# Altium PCB WIRELESS.PcbDoc
Units mm, origin at the board's own origin, x right, y up, seen from the top; angles counter-clockwise.
Board outline 49.5 x 65 mm, 2 copper layers (Top Layer, Bottom Layer); 68 components, 56 nets, 197 pads, 119 vias.
Unrouted connection lines stored in the file: 6.
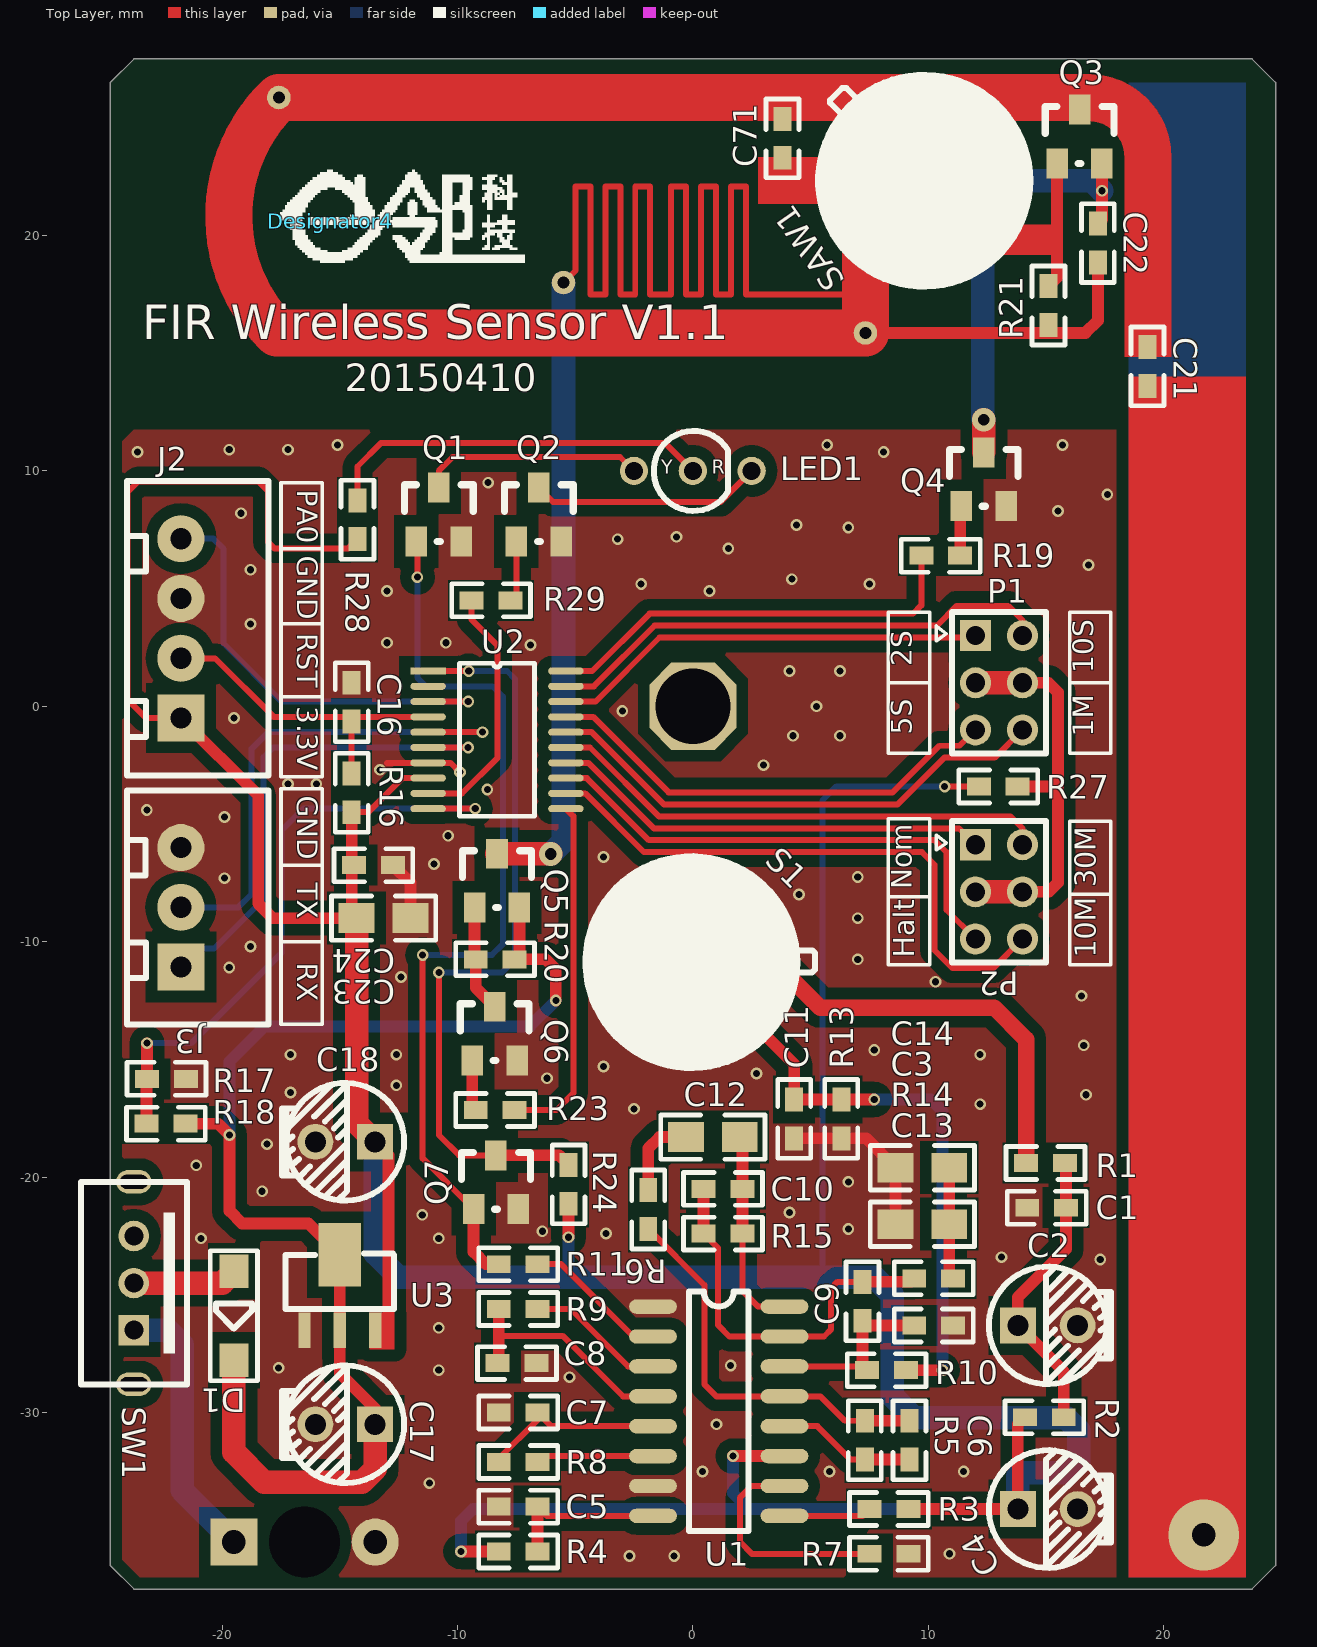
[diagram p0: Top Layer view]
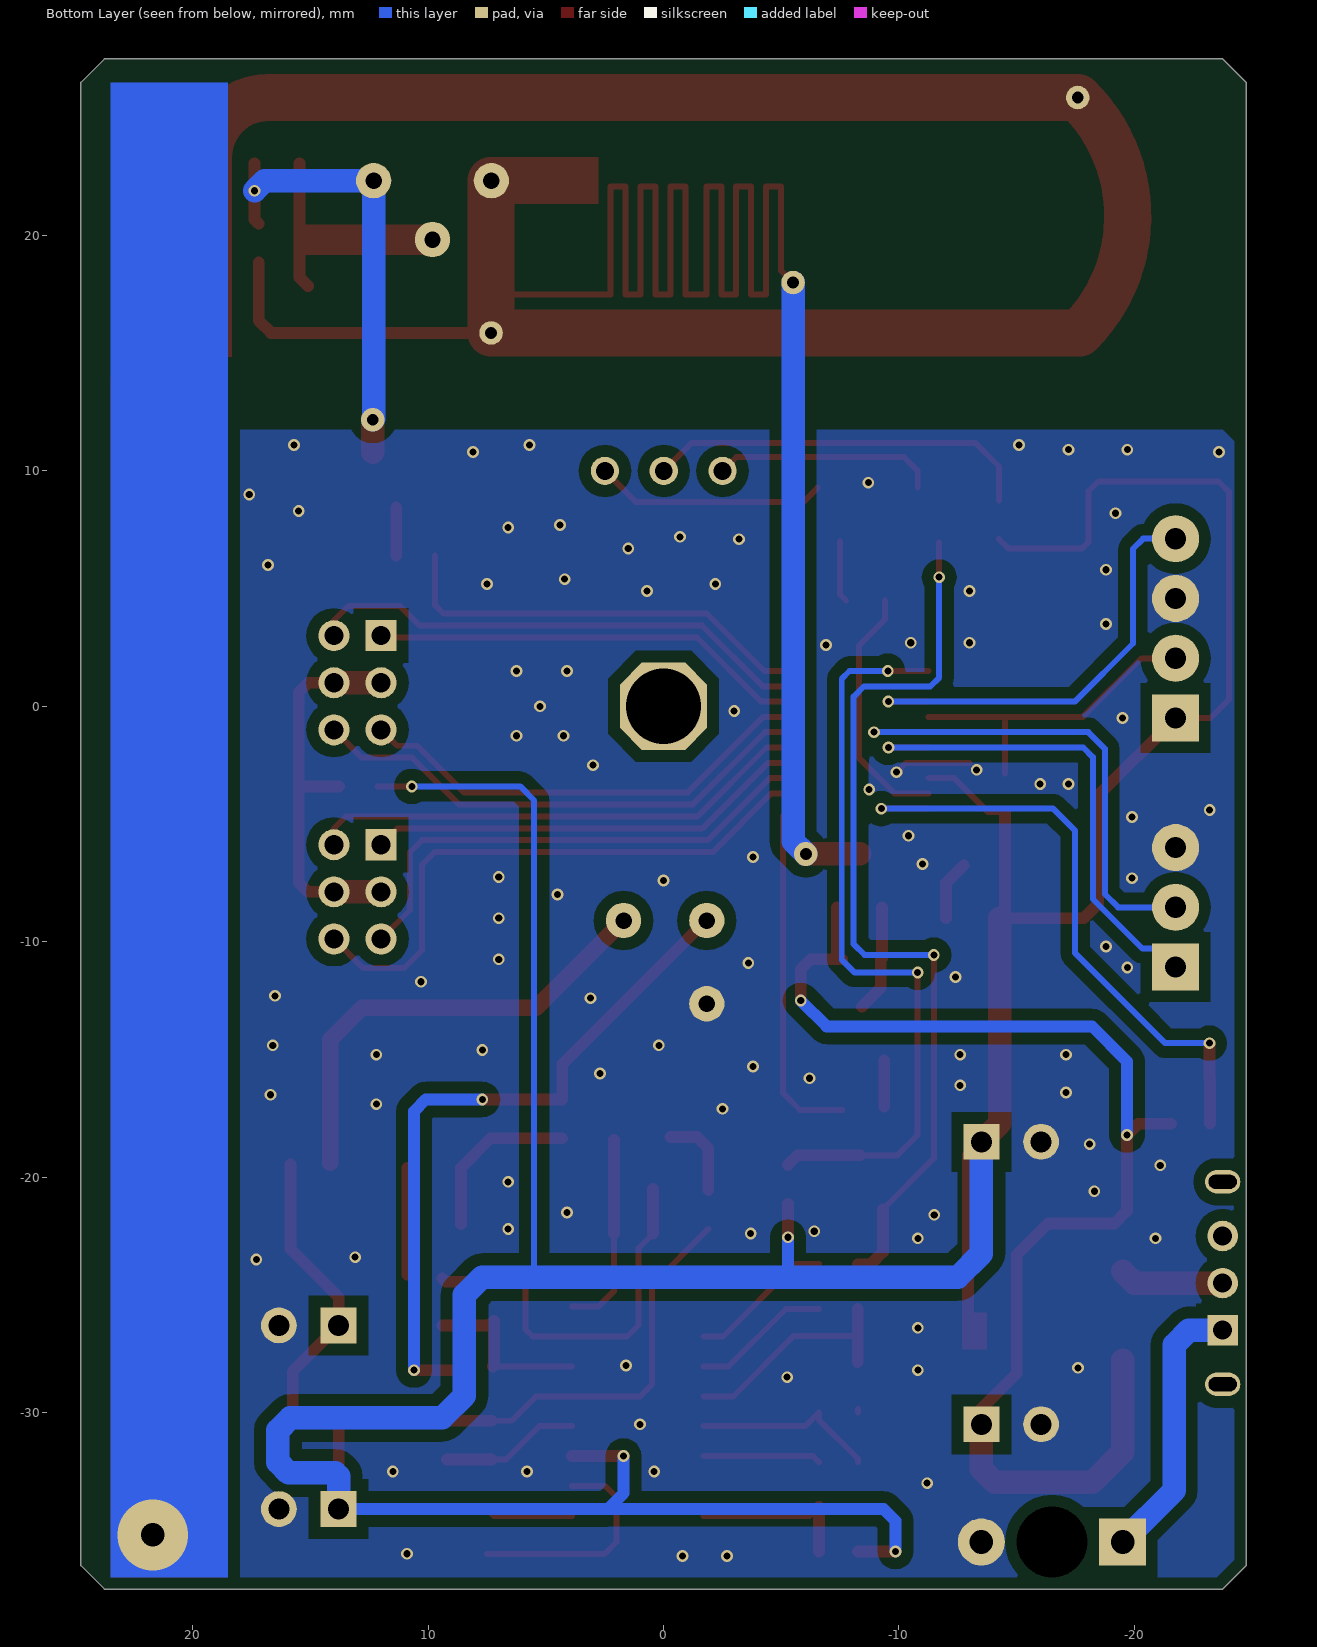
[diagram p1: Bottom Layer view, seen from below]

## Layer stack, top to bottom
Top Solder: solder mask 0.0102, Solder Resist, Dk 3.5
Top Layer: signal copper 0.0356
Dielectric 1: dielectric 0.32, FR-4, Dk 4.8
Bottom Layer: signal copper 0.0356
Bottom Solder: solder mask 0.0102, Solder Resist, Dk 3.5

## Board outline
-24.75,-36.5 -24.75,26.5 -23.75,27.5 23.75,27.5 24.75,26.5 24.75,-36.5 23.75,-37.5 -23.75,-37.5

## Design rules (kind name [scope] priority, off if disabled: settings)
Clearance [All] p1: gap=0.5
PolygonConnect [All] p1: connectstyle=Direct reliefconductorwidth=0.254 reliefentries=4 polygonreliefangle="90 Angle" airgapwidth=0.254
RoutingVias [All] p1: holewidth=0.711 width=1.27 viastyle="Through Hole" minholewidth=0.711 minwidth=1.27 maxholewidth=0.711 maxwidth=1.27
SolderMaskExpansion [All] p1: expansion=0.102
Width [All] p1: maxlimit=5 minlimit=0.254 preferedwidth=0.254
29 further rules are at their usual default settings.

## Components (designator, comment, footprint, x,y, rotation, side; value= is the part's Value field where it differs from the comment)
C1 "0.1uF" 0603 14.2,-21.3 r0 top locked
C2 "47uF/25V" "RB2.54 5*11" 13.8,-26.3 r0 top locked
C3 "10uF" 0805 8.6,-22 r0 top locked
C4 "47uF/25V" "RB2.54 5*11" 13.8,-34.1 r0 top locked
C5 "0.1uF" 0603 -6.6,-34 r180 top locked
C6 "0.01uF" 0603 9.2,-32 r90 top locked
C7 "0.1uF" 0603 -6.6,-30 r180 top locked
C8 "0.1uF" 0603 -8.3,-27.9 r0 top locked
C9 "470pF" 0603 7.2,-26.1 r90 top locked
C10 "0.01uF" 0603 2.1,-20.5 r180 top locked
C11 "0.01uF" 0603 4.3,-16.7 r270 top
C12 "10uF" 0805 -0.3,-18.3 r0 top locked
C13 "0.01uF" 0603 9.4,-26.3 r0 top locked
C14 "10uF" 0805 8.6,-19.6 r0 top locked
C16 "0.1uF" 0603 -14.5,1 r270 top locked
C17 "47uF/25V" "RB2.54 5*11" -13.5,-30.5 r180 top locked
C18 "47uF/25V" "RB2.54 5*11" -13.5,-18.5 r180 top locked
C21 "5P" 0603 19.304,15.265 r270 top
C22 "5P" 0603 17.2,20.5 r270 top locked
C23 "10uF" 0805 -12,-9 r180 top locked
C24 "0.1uF" 0603 -12.75,-6.75 r180 top locked
C71 "5P" 0603 3.8,23.3 r90 top locked
D1 "IN4148" SOD-123 -19.5,-24 r270 top locked
Designator4 "Comment" elinlogo1 -15.4,20.6 r0 top
J2 "XH2.54-4P" 2.54-4 -21.75,-0.5 r90 top locked
J3 "XH2.54-3P" 2.54-3 -21.75,-6 r270 top locked
L1 "315M-PCB" 315M-PCB -5.5,18 r0 top locked
LED1 "红黄LED" LED-K -2,10 r0 top locked
P1 "2.0*3双排插针" 2.0*3*2 13,1 r270 top locked
P2 "2.0*3双排插针" 2.0*3*2 13,-7.881 r270 top locked
Q1 "8050" SOT-23 -11.75,7 r0 top locked
Q2 "8050" SOT-23 -7.5,7 r0 top locked
Q3 "2SC3357" SOT-23 15.469,23.063 r0 top locked
Q4 "8050" SOT-23 11.4,8.5 r0 top locked
Q5 "8550" SOT-23 -9.278,-8.549 r0 top locked
Q6 "8050" SOT-23 -9.378,-15.049 r0 top locked
Q7 "8050" SOT-23 -9.322,-21.361 r0 top
R1 "27K" 0603 15.8,-19.4 r180 top locked
R2 "100K" 0603 14.1,-30.2 r0 top locked
R3 "10M" 0603 7.5,-34.1 r0 top locked
R4 "220K" 0603 -6.6,-35.9 r180 top locked
R5 "1M" 0603 7.3,-32 r90 top locked
R6 "10K" 0603 -1.9,-22.2 r90 top locked
R7 "2.2M" 0603 7.5,-36 r0 top locked
R8 "220K" 0603 -6.6,-32.1 r180 top locked
R9 "2K" 0603 -6.6,-25.6 r180 top locked
R10 "10K" 0603 7.4,-28.2 r0 top locked
R11 "4.7K" 0603 -6.6,-23.7 r180 top locked
R13 "1M" 0603 6.3,-16.7 r270 top
R14 "6.8K" 0603 9.4,-24.3 r0 top locked
R15 "1M" 0603 2.1,-22.4 r180 top locked
R16 "10K" 0603 -14.5,-4.5 r90 top locked
R17 "500K" 0603 -21.565,-17.729 r180 top locked
R18 "100K" 0603 -23.19,-15.824 r0 top locked
R19 "47K" 0603 9.7,6.4 r0 top locked
R20 "47K" 0603 -7.578,-10.749 r180 top locked
R21 "27K" 0603 15.1,16.2 r90 top locked
R23 "1K" 0603 -7.578,-17.149 r180 top locked
R24 "27K" 0603 -5.283,-21.133 r90 top
R27 "27K" 0603 13.792,-3.404 r180 top
R28 "1K" 0603 -14.25,8.75 r270 top locked
R29 "4.7K" 0603 -7.75,4.5 r180 top locked
S1 "FIR-RE200B" TO-39 1.7,-9.1 r45 top locked
SAW1 "CRYSTAL(表面接地)" TO-39 7.315,22.327 r180 top locked
SW1 "SW-SK12D07VG3" SW-SK12D07VG3 -23.75,-26.5 r90 top locked
U1 "BISS0001" SO-16 -1.7,-25.5 r0 top locked
U2 "STM8L051" TSSOP20 -11.25,1.5 r0 top locked
U3 "7133-1" SOT-89 -16.5,-26.5 r0 top locked

## Footprints (in the part's own frame and the unit in brackets; to place one, negate y for a bottom-side part, rotate by r counter-clockwise, add the part's x,y. Pads: shape width x height; smd on the part's side, far side on the other; paste and mask are expansions set on the pad)
2.0*3*2 [mil]
  rect 52x52 hole 32: 1(-78.74,-39.37)
  round 52 hole 32: 2(-78.74,39.37) 3(0,-39.37) 4(0,39.37) 5(78.74,-39.37) 6(78.74,39.37)
  silkscreen extent -118,-105 118,79
2.54-3 [mm]
  rect 2x2 hole 0.9: 1(5.08,0)
  round 2 hole 0.9: 2(2.54,0) 3(0,0)
  silkscreen extent -2.43,-2.29 7.51,3.71
2.54-4 [mm]
  rect 2x2 hole 0.9: 1(0,0)
  round 2 hole 0.9: 2(2.54,0) 3(5.08,0) 4(7.62,0)
  silkscreen extent -2.43,-3.71 10.07,2.29
315M-PCB [mm]
  round 1 hole 0.5: 1(0,0) 2(12.827,-2.14) 3(-12.09,7.86)
  Top Layer region: 8.255,3.335 9.525,3.335 9.525,5.335 8.255,5.335
  Top Layer region: 25.826,-3.163 25.826,-1.878 23.822,-1.878 23.822,-3.163
  Top Layer lines w0.254: 0,0 0.508,0.508 0.508,4.083 1.143,4.083 1.143,-0.508 1.778,-0.508 1.778,4.083 2.413,4.083 2.413,-0.508 3.048,-0.508 3.048,4.083 3.683,4.083 3.683,-0.508 4.572,-0.508 4.572,4.083 5.207,4.083 5.207,-0.508 5.842,-0.508 5.842,4.083 6.477,4.083 6.477,-0.508 7.112,-0.508 7.112,4.083 7.747,4.083 7.747,0.635 7.747,-0.508 12.319,-0.508
  Top Layer lines w2: -12.094,7.863 ccw(c-7.179,2.822) -12.173,-2.14 12.827,-2.14 12.827,4.337 9.398,4.337 ; -12.09,7.86 18.91,7.86 20.396,7.86 22.287,7.86 cw(c22.287,5.32) 24.827,5.32 ; 24.827,-2.14 24.827,5.218
  silkscreen extent 10.91,-0.12 19.83,8.8
0603 [mil]
  rect 40x30 smd: 1(0,0) 2(65,0)
  silkscreen extent -33,-28 98,28
0805 [mil]
  rect 60x50 smd: 1(0,0) 2(90,0)
  silkscreen extent -42,-37 132,37
elinlogo1 [mm]
  silkscreen extent -2.13,-1.73 8.25,2.18
LED-K [mm]
  round 1.2 hole 0.762: 1(-0.508,0) 2(1.992,0) 3(4.492,0)
  silkscreen extent 0.34,-1.7 3.49,1.7
"RB2.54 5*11" [mil]
  rect 60x60 hole 35: 1(0,0)
  round 60 hole 35: 2(100,0)
  silkscreen extent -48,-98 156,98
SO-16 [mil]
  oval 80x24 smd: 1(0,0) 2(0,-50) 3(0,-100) 4(0,-150) 5(0,-200) 6(0,-250) 7(0,-300) 8(0,-350) 9(220,-350) 10(220,-300) 11(220,-250) 12(220,-200) 13(220,-150) 14(220,-100) 15(220,-50) 16(220,0)
  silkscreen extent 60,-375 160,25
SOD-123 [mm]
  rect 1.418x1.22 smd: 1(0,0) 2(3.778,0)
  silkscreen extent -0.87,-1 4.65,1
SOT-23 [mil]
  rect 36x50 smd: 1(0,0) 2(75,0) 3(37.5,90)
  silkscreen extent -20,0 95,95
SOT-89 [mm]
  rect 0.52x1.5 smd: 1(0,0) 2(1.5,0) 3(3,0)
  rect 1.8x2.7 smd: 4(1.5,3.2)
  silkscreen extent -0.8,0.9 3.8,3.25
SW-SK12D07VG3 [mm]
  oval 1x1.5 hole 0.6 slot 1.2 at 90 deg: 0(-2.3,0) 0(6.3,0)
  rect 1.3x1.3 hole 0.8: 1(0,0)
  round 1.3 hole 0.8: 2(2,0) 3(4,0)
  silkscreen extent -2.3,-2.25 6.3,2.25
TO-39 [mm]
  round 1.5 hole 0.7: 1(0,0) 2(-2.5,2.5) 3(-5,0)
  silkscreen extent -7,-4.5 2,4.5
TSSOP20 [mm]
  rect 1.5x0.3 smd: 1(0,0)
  oval 1.5x0.3 smd: 2(0,-0.65) 3(0,-1.3) 4(0,-1.95) 5(0,-2.6) 6(0,-3.25) 7(0,-3.9) 8(0,-4.55) 9(0,-5.2) 10(0,-5.85) 11(5.85,-5.85) 12(5.85,-5.2) 13(5.85,-4.55) 14(5.85,-3.9) 15(5.85,-3.25) 16(5.85,-2.6) 17(5.85,-1.95) 18(5.85,-1.3) 19(5.85,-0.65) 20(5.85,0)
  silkscreen extent 1.33,-6.18 4.52,0.32

## Part data
C1 C5 C6 C7 C8 C9 C10 C11 C13 C16 C24: library part CAP-0603, "0603陶瓷贴片电容"
C2 C4 C17 C18: "铝电解电容"
C3 C12 C14 C23: library part CAP-0805, "0805陶瓷贴片电容"
C21 C22 C71: library part CAP
D1: "IN4148开关二极管"
J2: "XH2.54-4P 白色插座"
J3: "XH2.54-3P 白色母座"
L1: "板载PCB天线"
LED1: library part LED2, "3mm共阳极 双色红黄LED"
P1 P2: "2.0mm*3   双排插针"
Q1 Q2 Q4 Q6 Q7: "8050 NPN型三极管"
Q3: "2SC3357 高频二极管"
Q5: "8550  PNP三极管"
R1 R2 R3 R4 R5 R6 R7 R8 R9 R10 R11 R13 R14 R15 R16 R17 R18 R19 R20 R23 R24 R27 R28 R29: library part RES-0603, "陶瓷贴片电阻0603封装"
R21: library part RES1
SAW1: "R315A  声表"
SW1: "SK12D07VG3"
U2: "单片机"
U3: "7133-1   3.3V  LDO电源芯片"

## Free pads (board coordinates)
  rect 2x2 hole 1: ""(-19.5,-35.5)
  oct 0x0 hole 3: ""(-16.5,-35.5)
  round 2 hole 1: ""(-13.5,-35.5)
  oct 3.7x3.7 hole 3.2: ""(0,0)

## Via types
v1: diameter 0.5, hole 0.3, Top Layer to Bottom Layer, tented both sides, 116 vias
v2: diameter 1, hole 0.5, Top Layer to Bottom Layer, tented both sides, 2 vias
v3: diameter 3, hole 1, Top Layer to Bottom Layer, tented both sides, 1 vias

## Nets (pads, with @x,y where several pads share a name; then routed paths per layer and width w, separated by ;. In a path a pad name is that pad's centre, name@x,y a point inside that pad or via, vN(x,y) a via of type N, cw(c..) or ccw(c..) an arc to the next point about the centre after c; other vN are vias at no path point)
3.3V: C4.1 C18.1 C23.2 C24.2 J2.1 R2.1 R3.2 R4.2 R16.1 R24.1 R27.2 R28.2 U1.11 U2.8 U3.3 | length 180.8
  Top Layer w0.254: J2.1 -23.224,-0.5 -24.028,0.305 -24.028,9.093 -23.571,9.55 -18.466,9.55 -18.059,9.144 -18.059,6.985 -17.78,6.706 -14.643,6.706 R28.2 ; R16.1 -13.796,-4.5 -12.346,-3.05 U2.8 ; v1(10.693,-3.404) R27.2
  Top Layer w0.5: J2.1 -18.466,-3.784 -18.466,-8.382 -17.848,-9 C23.2 -14.5,-8.786 R16.1 ; C18.1 -12.929,-19.071 -12.929,-27.076 ; v1(-9.85,-35.9) R4.2 ; v1(-5.283,-22.555) R24.1 ; v1(1.7,-31.85) U1.11 ; R3.2 C4.1 13.8,-30.5 R2.1
  Top Layer w1: C23.2 -14.286,-17.714 C18.1
  Bottom Layer w0.254: 5.496,-24.146 5.496,-4 6.093,-3.404 v1(10.693,-3.404)
  Bottom Layer w0.5: v1(-9.85,-35.9) -9.85,-34.6 -9.35,-34.1 2.375,-34.1 ; -5.283,-24.217 v1(-5.283,-22.555) ; v1(1.7,-31.85) 1.7,-33.425 2.375,-34.1 ; C4.1 2.375,-34.1
  Bottom Layer w1: C18.1 -13.5,-23.25 -12.5,-24.25 7.708,-24.25 8.458,-25 8.458,-29.286 9.398,-30.226 15.85,-30.226 16.383,-30.759 16.383,-32.106 15.926,-32.563 13.945,-32.563 13.8,-32.707 C4.1
AD_IN18: R17.2 R18.1 U2.10 | length 26.5
  Top Layer w0.254: U2.10 v1(-9.25,-4.35)
  Top Layer w0.5: R17.2 R18.1@-23.216,-15.85 ; R18.1 v1(-23.19,-14.31)
  Bottom Layer w0.254: v1(-23.19,-14.31) -21.31,-14.31 -17.483,-10.483 -17.483,-5.283 -16.55,-4.35 v1(-9.25,-4.35)
ANT: C21.2
GND: C1.1 C2.2 C3.1 C4.2 C5.2 C7.2 C8.2 C11.2 C13.2 C14.1 C16.1 C17.2 C18.2 C23.1 C24.1 J2.3 J3.3 pad.@-13.5,-35.5 Q1.2 Q2.2 Q4.2 Q6.2 Q7.2 R7.2 R13.2 R18.2 S1.3 U1.1 U1.7 U2.7 U3.1 | length 15.1
  Top Layer w0.254: -13,-2.4 U2.7 -10.3,-2.4 v1(-9.9,-2.8) ; C7.2 C7.2@-8.251,-29.851
  Top Layer w0.5: C24.1 -12,-7.5 C23.1 ; C11.2 R13.2 ; C11.2@4.4,-18.351 R13.2 ; C3.1 C14.1 7.351,-18.351 R13.2
  other v1: -2.7,-36.1 -0.8,-36.1 10.9,-36 -11.2,-33 0.4,-32.5 5.8,-32.5 11.5,-32.5 1,-30.5 -5.25,-28.5 -10.8,-28.2 -17.6,-28.1 1.6,-28 -10.8,-26.4 17.3,-23.5 13.1,-23.4 -20.9,-22.6 -10.8,-22.6 -3.7,-22.4 -6.4,-22.3 6.6,-22.2 -11.5,-21.6 4.1,-21.5 -18.3,-20.6 6.6,-20.2 -21.1,-19.5 -18.1,-18.6 -2.5,-17.1 12.2,-16.9 16.7,-16.5 -17.1,-16.4 -12.6,-16.1 -6.2,-15.8 2.7,-15.6 -3.8,-15.3 -17.1,-14.8 -12.6,-14.8 12.2,-14.8 7.7,-14.6 0.2,-14.4 16.6,-14.4 3.1,-12.4 16.5,-12.3 10.3,-11.7 -12.4,-11.5 -19.7,-11.1 -3.6,-10.9 7,-10.75 -18.8,-10.2 7,-9 4.5,-8 0,-7.4 -19.9,-7.3 7,-7.25 -11,-6.7 -3.8,-6.4 -10.4,-5.5 -19.9,-4.7 -23.2,-4.4 -8.736,-3.53 -17.2,-3.3 -16,-3.3 -13.3,-2.7 3,-2.5 4.25,-1.25 6.25,-1.25 -19.5,-0.5 -3,-0.2 5.25,0 4.1,1.5 6.25,1.5 -6.9,2.6 -13,2.7 -10.5,2.7 -18.8,3.5 -13,4.9 0.7,4.9 -2.2,5.2 7.5,5.2 4.2,5.4 -18.8,5.8 16.8,6 1.5,6.7 -3.2,7.1 -0.7,7.2 6.6,7.6 4.4,7.7 -19.2,8.2 15.5,8.3 17.6,9 -8.7,9.5 -23.6,10.8 8.1,10.8 -19.7,10.9 -17.2,10.9 -15.1,11.1 5.7,11.1 15.7,11.1
NetC1_2: C1.2 C2.1 R1.1 R2.2 | length 12.4
  Top Layer w0.5: R2.2 15.751,-28.251 C2.1 13.8,-25.1 15.851,-23.049 C1.2 R1.1@15.851,-19.451
NetC3_2: C3.2 C14.2 R14.2 | length 4.5
  Top Layer w0.5: R14.2@10.886,-24.135 C3.2 C14.2
NetC5_1: C5.1 R4.1 U1.8 | length 7
  Top Layer w0.254: C5.1 -6.21,-34.39 U1.8
  Top Layer w0.5: R4.1 C5.1
NetC6_1: C6.1 R5.1 U1.12 | length 5.9
  Top Layer w0.254: U1.12 5.28,-30.58 6.7,-32 R5.1
  Top Layer w0.5: R5.1 C6.1
NetC6_2: C6.2 R5.2 R6.1 U1.13 | length 16.9
  Top Layer w0.254: R6.1 0.483,-24.583 0.483,-28.804 0.989,-29.31 U1.13 5.41,-29.31 6.449,-30.349 R5.2
  Top Layer w0.5: R5.2 C6.2
NetC7_1: C7.1 R8.2 U1.5 | length 7.9
  Top Layer w0.254: R8.2 -8.251,-31.951 -6.6,-30.3 C7.1 -6.02,-30.58 U1.5
NetC8_1: C8.1 R9.2 U1.4 | length 9.9
  Top Layer w0.254: -8.251,-26.67 -8.175,-26.746 -5.537,-26.746 -2.973,-29.31 U1.4
  Top Layer w0.5: C8.1@-8.251,-27.851 -8.251,-26.67 R9.2
NetC9_1: C9.1 C13.1 R10.1 U1.14 | length 7.6
  Top Layer w0.254: U1.14 R10.1@7.24,-28.04
  Top Layer w0.5: R10.1@7.24,-28.04 7.2,-28 C9.1 7.4,-26.3 C13.1
NetC9_2: C9.2 C10.2 R14.1 R15.2 U1.15 | length 16.6
  Top Layer w0.255: R15.2 1.067,-23.018 1.067,-26.289 1.548,-26.77 U1.15 5.564,-26.77 5.867,-26.467 5.867,-24.714 6.133,-24.449 C9.2
  Top Layer w0.5: R15.2 C10.2 ; C9.2 9.251,-24.449 R14.1
NetC10_1: C10.1 C12.2 R15.1 U1.16 | length 8.5
  Top Layer w0.254: R15.1 2.1,-24.833 2.767,-25.5 U1.16
  Top Layer w0.5: R15.1 C10.1 C12.2@2.1,-18.414
NetC11_1: C11.1 R10.2 R13.1 S1.2 | length 29.1
  Top Layer w0.5: S1.2 -1.8,-9.1 4.3,-15.2 C11.1 ; C11.1@4.4,-16.7 R13.1 v1(7.7,-16.7) ; R10.2 v1(10.6,-28.2)
  Bottom Layer w0.5: v1(7.7,-16.7) 10.1,-16.7 10.6,-17.2 v1(10.6,-28.2)
NetC12_1: C12.1 R6.2 | length 3.6
  Top Layer w0.5: R6.2 -1.9,-18.778 -1.422,-18.3 C12.1
NetC21_1: C21.1 C71.2 L1.3 Q3.3
NetC22_1: C22.1 Q3.2 Q4.3 SAW1.3 | length 19.5
  Top Layer w0.5: SAW1.3 SAW1.3@12.353,22.289 ; C22.1 17.374,20.674 v1(17.374,21.9) Q3.2
  Top Layer w1: Q4.3 v2(12.353,12.175)
  Bottom Layer w1: v2(12.353,12.175) 12.315,12.212 SAW1.3 16.947,22.327 v1(17.374,21.9)
NetC22_2: C22.2 C71.1 L1.2 R21.1 SAW1.1 | length 12.6
  Top Layer w0.5: L1.2 16.673,15.86 17.2,16.387 C22.2
NetD1_1: D1.1 SW1.2 | length 4.5
  Top Layer w1: SW1.2 -20,-24.5 D1.1
NetL1_1: L1.1 Q5.3 | length 26.8
  Top Layer w1: Q5.3 v2@-6.045,-6.263
  Bottom Layer w1: v2(-6.045,-6.274) -5.5,-5.729 L1.1
  other v3: 21.7,-35.2
NetLED1_1: LED1.1 Q1.3 | length 9.5
  Top Layer w0.254: Q1.3 -10.797,10.005 -10.211,10.592 -3.1,10.592 LED1.1
NetLED1_2: LED1.2 R28.1 | length 16.6
  Top Layer w0.254: R28.1 -14.25,10.185 -13.259,11.176 -1.184,11.176 LED1.2
NetLED1_3: LED1.3 Q2.3 | length 9.8
  Top Layer w0.254: Q2.3 -5.948,8.687 1.179,8.687 LED1.3
NetQ1_1: Q1.1 Q7.1 R11.2 | length 38.6
  Top Layer w0.254: v1(-11.709,5.486) Q1.1@-11.709,6.959 ; v1(-11.481,-10.566) -11.481,-19.202 Q7.1
  Top Layer w0.5: Q7.1 -9.322,-23.178 -8.8,-23.7 R11.2
  Bottom Layer w0.254: v1(-11.709,5.486) -11.709,1.219 -11.328,0.838 -8.509,0.838 -8.077,0.406 -8.077,-10.102 -8.542,-10.566 v1(-11.481,-10.566)
NetQ2_1: Q2.1 R29.1 | length 2.6
  Top Layer w0.254: R29.1 -7.5,4.75 Q2.1
NetQ3_1: Q3.1 R21.2 SAW1.2 | length 11.2
  Top Layer w0.5: SAW1.2 14.924,19.827 15.469,20.371 ; R21.2 15.469,18.22 15.469,20.371 ; Q3.1 15.469,20.371
NetQ4_1: Q4.1 R19.2 | length 2.1
  Top Layer w0.5: R19.2 Q4.1@11.351,8.451
NetQ5_1: Q5.1 Q6.3 R20.2 | length 4.5
  Top Layer w0.5: R20.2@-9.278,-10.7 Q5.1 ; R20.2 -9.229,-11.96 Q6.3
NetQ6_1: Q6.1 R23.2 | length 2
  Top Layer w0.5: R23.2@-9.378,-17 Q6.1
NetR1_2: R1.2 S1.1 | length 19.8
  Top Layer w0.7: S1.1 5.4,-12.8 12.8,-12.8 14.149,-14.149 R1.2
NetR3_1: R3.1 U1.9 | length 3.7
  Top Layer w0.254: U1.9 7.21,-34.39 R3.1
NetR7_1: R7.1 U1.10 | length 9.7
  Top Layer w0.254: U1.10 2.48,-33.12 2,-33.6 2,-35.5 2.5,-36 R7.1
NetR8_1: R8.1 U1.6 | length 5
  Top Layer w0.254: R8.1 -6.35,-31.85 U1.6
NetR9_1: R9.1 U1.3 | length 5.9
  Top Layer w0.254: R9.1 -5.2,-25.6 -2.76,-28.04 U1.3
NRST: C16.2 J2.2 R16.2 U2.4 | length 13.7
  Top Layer w0.254: J2.2 -20.303,2.04 -17.813,-0.45 U2.4 ; R16.2 C16.2
PA0: J2.4 U2.3 | length 19.1
  Top Layer w0.254: U2.3 v1(-9.547,0.2)
  Bottom Layer w0.254: J2.4 -20.371,7.12 -19.939,6.688 -19.939,2.667 -17.472,0.2 v1(-9.547,0.2)
PA2_USART_TX: J3.2 U2.5 | length 21.8
  Top Layer w0.254: U2.5 v1(-8.941,-1.1)
  Bottom Layer w0.254: J3.2 -19.31,-8.54 -18.745,-7.976 -18.745,-1.803 -18.042,-1.1 v1(-8.941,-1.1)
PA3_USART_RX: J3.1 U2.6 | length 21.3
  Top Layer w0.254: U2.6 v1(-9.55,-1.75)
  Bottom Layer w0.254: J3.1 -20.964,-10.294 -20.345,-10.294 -18.237,-8.186 -18.237,-2.159 -17.828,-1.75 v1(-9.55,-1.75)
PB1: R23.1 U2.11 | length 15
  Top Layer w0.254: R23.1 -5.795,-17.149 -5.08,-16.434 -5.08,-4.67 U2.11
PB2: P2.6 U2.12 | length 25.1
  Top Layer w0.254: U2.12 -4.58,-3.7 -2.083,-6.198 9.728,-6.198 10.262,-6.731 10.262,-10.363 11.024,-11.125 12.756,-11.125 P2.6
PB3: P2.5 U2.13 | length 21.7
  Top Layer w0.254: U2.13 -4.512,-3.05 -1.872,-5.69 10.262,-5.69 10.77,-6.198 10.77,-8.651 P2.5
PB4: P2.1 U2.14 | length 18.8
  Top Layer w0.254: U2.14 -4.444,-2.4 -1.662,-5.182 11.301,-5.182 P2.1
PB5: P2.2 U2.15 | length 21.5
  Top Layer w0.254: U2.15 -4.375,-1.75 -1.452,-4.674 13.487,-4.674 14,-5.186 P2.2
PB6: P1.6 U2.16 | length 22
  Top Layer w0.254: U2.16 -4.307,-1.1 -1.241,-4.166 8.694,-4.166 10.675,-2.184 12.816,-2.184 P1.6
PB7: P1.5 U2.17 | length 19.8
  Top Layer w0.254: U2.17 -4.238,-0.45 -1.031,-3.658 8.484,-3.658 10.465,-1.676 11.324,-1.676 P1.5
PC0: P1.1 U2.18 | length 18.6
  Top Layer w0.254: U2.18 -4.143,0.2 -1.422,2.921 11.921,2.921 P1.1
PC1: P1.2 U2.19 | length 21.7
  Top Layer w0.254: U2.19 -4.212,0.85 -1.633,3.429 10.363,3.429 11.201,4.267 13.386,4.267 14,3.653 P1.2
PC4: R19.1 U2.20 | length 18.4
  Top Layer w0.254: U2.20 -4.28,1.5 -1.843,3.937 9.347,3.937 9.7,4.29 R19.1
PC5_SENSOR: Q7.3 R24.2 U2.1 | length 32.1
  Top Layer w0.254: U2.1 -9.526,1.5 v1(-9.525,1.499) ; v1(-10.795,-11.303) -10.795,-18.212 -9.931,-19.075 Q7.3
  Top Layer w0.5: Q7.3 -5.69,-19.075 R24.2
  Bottom Layer w0.254: v1(-10.795,-11.303) -8.103,-11.303 -7.569,-10.77 -7.569,1.168 -7.899,1.499 v1(-9.525,1.499)
PC6: U2.2
PD0: R29.2 U2.9 | length 10.7
  Top Layer w0.254: U2.9 -9.81,-3.7 -8.31,-2.2 -8.31,2.592 -9.401,3.683 R29.2
VDC: C17.1 D1.2 Q5.2 R17.1 R20.1 U3.2 U3.4 | length 54.7
  Top Layer w0.5: R17.1 -20.168,-17.729 v1(-19.685,-18.212) -19.685,-21.438 -19.152,-21.971 -16.329,-21.971 U3.4 U3.2 -15,-28.332 -13.5,-29.832 C17.1 ; Q5.2 -7.373,-10.544 R20.1 -6.251,-10.749 -5.827,-11.173 v1(-5.827,-12.5)
  Top Layer w1: D1.2 -19.5,-31.681 -18.212,-32.969 -14.072,-32.969 -13.5,-32.398 C17.1
  Bottom Layer w0.5: v1(-19.685,-18.212) -19.685,-15.085 -18.2,-13.6 -6.927,-13.6 v1(-5.827,-12.5)
VIN: pad.@-19.5,-35.5 SW1.1 | length 11.6
  Bottom Layer w1: SW1.1 -22.319,-26.5 -21.692,-27.127 -21.692,-33.308 pad.@-19.5,-35.5
VM: P1.3 P1.4 P2.3 P2.4 R27.1 | length 17.1
  Top Layer w0.5: R27.1 15.496,-3.404 ; P2.4 15.119,-7.881 15.5,-7.5 15.5,0.6 15.1,1 P1.4
  Top Layer w1: P2.3 P2.4 ; P1.3 P1.4
VO: R11.1 U1.2 | length 6.2
  Top Layer w0.254: R11.1 -5.6,-23.7 -2.53,-26.77 U1.2
pads on no net: SW1.0 SW1.3

## Polygon pours and split planes (outlines as drawn)
GND on Bottom Layer "Top Layer-No Net" (solid, pour order 8): -23.504,11.75 -23.753,11.75 -24.25,11.25 -24.25,-2 -24.25,-36.25 -23.504,-37 -21.017,-37 23.503,-37 24,-36.5 24,-35 24,11 23.254,11.75
GND on Top Layer "Top Layer-No Net" (solid, pour order 12): -23.75,11.75 -24.25,11.25 -24.25,-36.25 -23.5,-37 -21,-37 23,-37 23.5,-36.5 23.5,-35.5 23.5,11 22.75,11.75

## Other copper
Top Layer:
  rectangle net NetQ3_1: 9.474,19.177 15.646,20.472
  rectangle net 3.3V: -13.741,-27.33 -12.675,-25.756
  rectangle net NetL1_1: 18.5,-37 23.5,14
  pour cut-out: -23,26.5 ccw(c-23,25.5) -24,25.5 -24,15.5 ccw(c-21.5,15.5) -21.5,13 22,13 ccw(c22,15) 24,15 24,25.5 ccw(c23,25.5) 23,26.5
Bottom Layer:
  rectangle: 18.5,-37 23.5,26.5
  pour cut-out: -23,26.5 ccw(c-23,25.5) -24,25.5 -24,15.5 ccw(c-21.5,15.5) -21.5,13 22,13 ccw(c22,15) 24,15 24,25.5 ccw(c23,25.5) 23,26.5

## Silkscreen, mask and mechanical layers (free items; w line width, h text height)
Top Overlay:
  circle w0.15: c0,-11 r0.707
  circle w5: c9.8,22.3 r1.972
  circle w5: c-0.1,-10.8 r1.972
  rectangle: -22.5,-27.5 -22,-21.5
  lines w0.15: -17.5,-10 -15.75,-10 ; -17.5,-6.75 -15.75,-6.75 ; -17.5,0.4 -15.75,0.4 ; -17.5,3.5 -15.75,3.5 ; -17.5,6.7 -15.75,6.7 ; 8.35,-8.081 10,-8.081 ; 8.35,1 10,1 ; 16.05,-7.981 17.7,-7.981 ; 16.05,1 17.7,1 ; -17.5,-13.5 -15.75,-13.5 -15.75,-3.5 -17.5,-3.5 -17.5,-13.5 ; -17.5,-3 -17.5,9.5 -15.75,9.5 -15.75,-3 -17.5,-3 ; 8.3,-10.981 10.05,-10.981 10.05,-4.781 8.3,-4.781 8.3,-10.981 ; 8.3,-2 10.05,-2 10.05,4 8.3,4 8.3,-2 ; 16,-10.981 17.75,-10.981 17.75,-4.881 16,-4.881 16,-10.981 ; 16,-2 16,4 17.75,4 17.75,-2 16,-2
  text "FIR Wireless Sensor V1.1" at -23.4,15.1 h2.5
  text "20150410" at -14.8,13 h2
  text "PA0" at -17.1,9.2 h1.5 r270
  text "GND" at -17.1,6.4 h1.5 r270
  text "RST" at -17.1,3.1 h1.5 r270
  text "2S" at 9.6,1.7 h1.5 r90
  text "10S" at 17.3,1.4 h1.5 r90
  text "3.3V" at -17.1,0 h1.5 r270
  text "5S" at 9.6,-1.2 h1.5 r90
  text "1M" at 17.3,-1.3 h1.5 r90
  text "GND" at -17.1,-3.8 h1.5 r270
  text "TX" at -17.1,-7.5 h1.5 r270
  text "30M" at 17.4,-7.681 h1.52 r90
  text "Nom" at 9.6,-7.781 h1.5 r90
  text "Halt" at 9.7,-10.681 h1.52 r90
  text "10M" at 17.4,-10.681 h1.52 r90
  text "RX" at -17.1,-10.9 h1.5 r270
Mechanical 1:
  the board outline again, w0.254

## Text inside footprints (layer, text, board x,y; h text height)
LED1: Top Overlay "Y" at -1.34,9.695 h1; Top Overlay "R" at 0.794,9.695 h1